# EAGLE board PCB-VU-SE-1 (EAGLE 6.4)
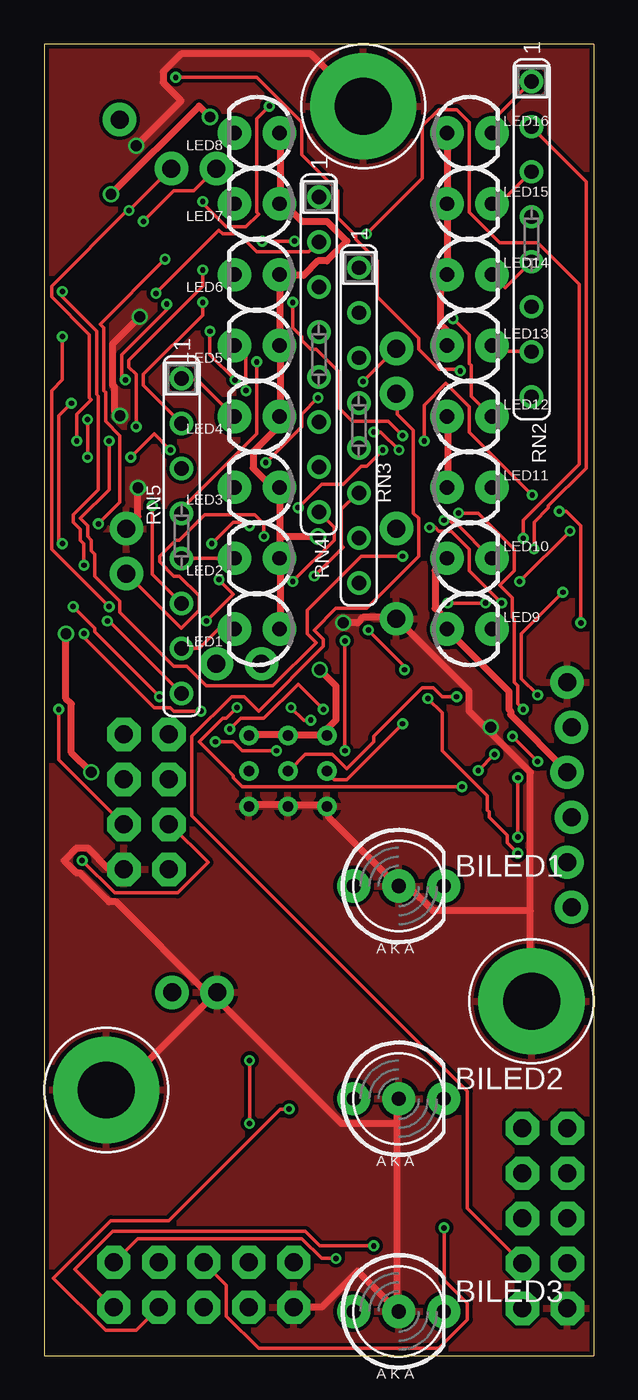
[diagram p0: board, top side]
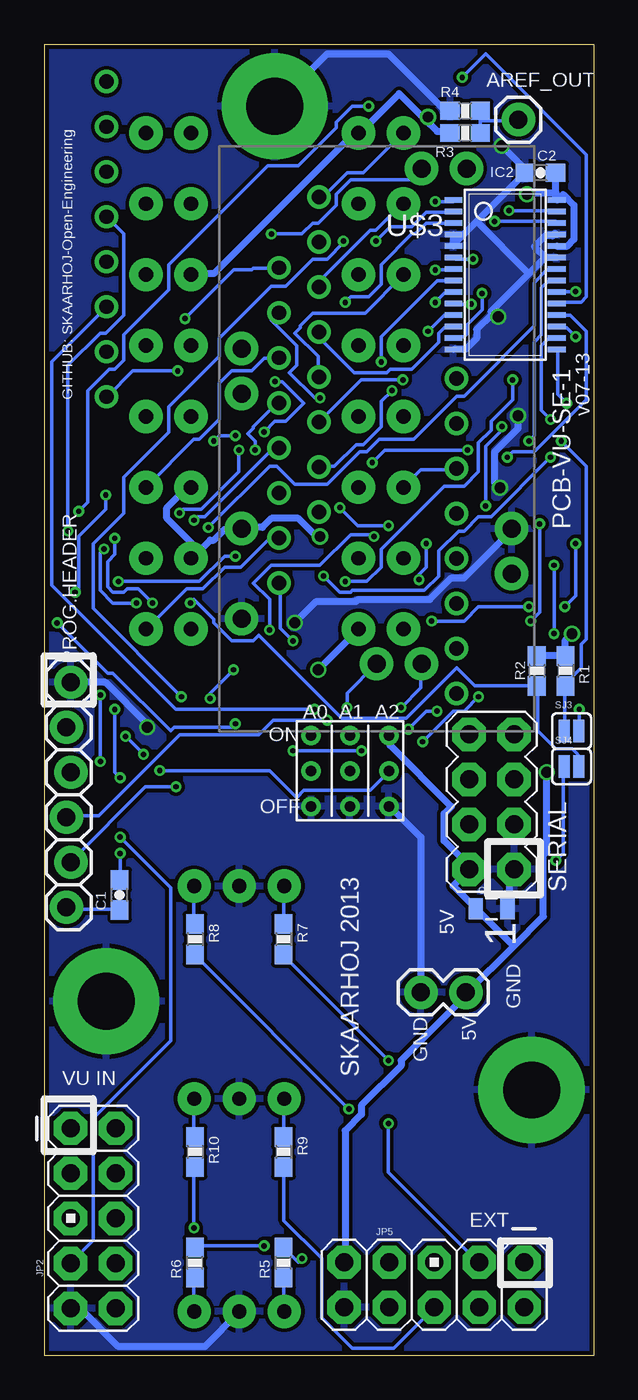
[diagram p1: board, bottom side, seen from below]

Size 31 x 74 mm. Coordinates in mm from the lower left corner, seen from the top.
Outline: 0,0 31,0 31,74 0,74 0,0
Copper layers (1*16): Top 0.035mm / dielectric 1.5mm / Bottom 0.035mm
Design rules "Fusion_eagle_rule_v1.1": minimum track width 6mil, minimum drill 12mil, track to track 6mil, track to pad 6mil, pad to pad 6mil, via to via 6mil, smd to smd 0mil, copper to edge 10mil, drill to drill 10mil, minimum pad ring 10mil, minimum via ring 6mil, stop-mask expansion 2mil, vias tented up to drill 100mil, thermal gap 10mil
Net classes: 0 default: width 0.203 mm, drill 0.305 mm, clearance 0.203 mm; 1 Power: width 0.406 mm, drill 0.61 mm, clearance 0.203 mm

## Footprints (pad centres in the part's own frame; a part is rotated, then mirrored left to right if it is on the bottom)
1X01 = drill 1.016 pad 1.88: 1 0,0
LED5MM-BICOLOR = drill 0.813 pad 1.88: A2 2.54,0; A3 -2.54,0; K1 0,0
0603-CAP = smd 1.1 x 1: 1 -0.85,0; 2 0.85,0
0805 = smd 0.8 x 1.2: 1 -0.9,0; 2 0.9,0
TSSOP28 = smd 0.305 x 0.991: 1 -4.225,-2.918; 2 -3.575,-2.918; 3 -2.925,-2.918; 4 -2.275,-2.918; 5 -1.625,-2.918; 6 -0.975,-2.918; 7 -0.325,-2.918; 8 0.325,-2.918; 9 0.975,-2.918; 10 1.625,-2.918; 11 2.275,-2.918; 12 2.925,-2.918; 13 3.575,-2.918; 14 4.225,-2.918; 15 4.225,2.918; 16 3.575,2.918; 17 2.925,2.918; 18 2.275,2.918; 19 1.625,2.918; 20 0.975,2.918; 21 0.325,2.918; 22 -0.325,2.918; 23 -0.975,2.918; 24 -1.625,2.918; 25 -2.275,2.918; 26 -2.925,2.918; 27 -3.575,2.918; 28 -4.225,2.918
1X02 = drill 1.016 pad 1.88: 1 0,0; 2 2.54,0
AVR_ICSP = drill 1.016 pad 1.88 octagon: 1 -1.27,5.08; 2 1.27,5.08; 3 -1.27,2.54; 4 1.27,2.54; 5 -1.27,0; 6 1.27,0; 7 -1.27,-2.54; 8 1.27,-2.54; 9 -1.27,-5.08; 10 1.27,-5.08
LED3MM = drill 0.813 pad 1.88: A -1.27,0; K 1.27,0
1X06_LOCK = drill 1.016 pad 1.88: 1 0,0; 2 2.54,-0.254; 3 5.08,0; 4 7.62,-0.254; 5 10.16,0; 6 12.7,-0.254
0603-RES = smd 1.1 x 1: 1 -0.85,0; 2 0.85,0
SIL8 = drill 0.813: 1 -8.89,0; 2 -6.35,0; 3 -3.81,0; 4 -1.27,0; 5 1.27,0; 6 3.81,0; 7 6.35,0; 8 8.89,0
2X4 = drill 1.016 pad 1.88 octagon: 1 -3.81,-1.27; 2 -3.81,1.27; 3 -1.27,-1.27; 4 -1.27,1.27; 5 1.27,-1.27; 6 1.27,1.27; 7 3.81,-1.27; 8 3.81,1.27
SJ_2S = smd 0.635 x 1.27: 1 -0.412,0; 2 0.412,0
ARDUINO_MINI_SE1 = drill 1.016 pad 1.88: 1 -7.62,7.62; 4 -7.62,5.08; 5 0,12.7; 6 -2.54,12.7; 8 -2.54,-15.24; 9 -5.08,-15.24; 17 7.62,-5.08; 18 7.62,-2.54; 21 7.62,5.08; 23 7.62,10.16
3.2MMPAD6MM = drill 3.2 pad 6: P$1 0,0
3BITADDR = drill 0.6: A0 -2.2,0; A1 0,0; A2 2.2,0; H1 -2.2,2; H2 0,2; H3 2.2,2; L1 -2.2,-2; L2 0,-2; L3 2.2,-2

## Placement (x,y rotation side)
AREF_OUT  M01PTH  [1X01]  4.25,69.75 0 bottom
BILED1  LEDBICOLOR-AKA  [LED5MM-BICOLOR]  20,26.5 0 top
BILED2  LEDBICOLOR-AKA  [LED5MM-BICOLOR]  20,14.5 0 top
BILED3  LEDBICOLOR-AKA  [LED5MM-BICOLOR]  20,2.5 0 top
C1  100nF  [0603-CAP]  26.75,26 90 bottom
C2  100nF  [0603-CAP]  3,66.75 180 bottom
C3  10uF  [0805]  5.76,25.23 0 bottom
IC2  PCA9685  [TSSOP28]  5,61 270 bottom
JP1  [1X02]  9.75,20.5 0 bottom
JP2  M05X2PTH  [AVR_ICSP]  28.25,7.75 0 bottom
JP5  M05X2PTH  [AVR_ICSP]  9,4 270 bottom
LED1  [LED3MM]  12,41 180 top
LED2  [LED3MM]  12,45 180 top
LED3  [LED3MM]  12,49 180 top
LED4  [LED3MM]  12,53 180 top
LED5  [LED3MM]  12,57 180 top
LED6  [LED3MM]  12,61 180 top
LED7  [LED3MM]  12,65 180 top
LED8  [LED3MM]  12,69 180 top
LED9  [LED3MM]  24,41 0 top
LED10  [LED3MM]  24,45 0 top
LED11  [LED3MM]  24,49 0 top
LED12  [LED3MM]  24,53 0 top
LED13  [LED3MM]  24,57 0 top
LED14  [LED3MM]  24,61 0 top
LED15  [LED3MM]  24,65 0 top
LED16  [LED3MM]  24,69 0 top
PROG.HEADER  [1X06_LOCK]  29.5,38 270 bottom
R1  1K5  [0603-RES]  1.58,38.65 270 bottom
R2  1K5  [0603-RES]  3.21,38.65 270 bottom
R3  [0603-RES]  7.25,69 180 bottom
R4  [0603-RES]  7.25,70.25 0 bottom
R5  270  [0603-RES]  17.5,5.25 90 bottom
R6  270  [0603-RES]  22.5,5.25 90 bottom
R7  270  [0603-RES]  17.5,23.5 270 bottom
R8  270  [0603-RES]  22.5,23.5 270 bottom
R9  270  [0603-RES]  17.5,11.5 270 bottom
R10  270  [0603-RES]  22.5,11.5 270 bottom
RN2  [SIL8]  27.5,63 270 top
RN3  [SIL8]  17.75,52.5 270 top
RN4  [SIL8]  15.5,56.5 270 top
RN5  [SIL8]  7.75,46.25 270 top
SERIAL  M04X2  [2X4]  5.76,31.25 90 bottom
SJ3  SOLDERJUMPERNC  [SJ_2S]  1.25,35.25 0 bottom
SJ4  SOLDERJUMPERNC  [SJ_2S]  1.25,33.25 0 bottom
U$3  ARDUINO_MINI_SE1  [ARDUINO_MINI_SE1]  12.25,51.75 180 bottom
U$15  GNDPAD6MM  [3.2MMPAD6MM]  3.5,15 0 top
U$18  GNDPAD6MM  [3.2MMPAD6MM]  27.5,20 0 top
U$19  3BITADDR  [3BITADDR]  13.75,33 0 bottom
U$20  GNDPAD6MM  [3.2MMPAD6MM]  18,70.5 0 top

## Library data of the parts
AREF_OUT C1-C3 JP1 JP2 JP5 LED1-LED16 PROG.HEADER R1-R10 SERIAL SJ3 SJ4 = SparkFun
BILED1-BILED3 U$3 U$15 U$18-U$20 = SKAARHOJ
IC2 = wsmith
RN2-RN5 = SKAARHOJ; OC_FARNELL: unknown; OC_NEWARK: unknown

## Nets
5V [Power]: C2.1 C3.1 IC2.24 IC2.28 JP1.2 JP5.9 LED1.A LED2.A LED3.A LED4.A LED5.A LED6.A LED7.A LED8.A LED9.A LED10.A LED11.A LED12.A LED13.A LED14.A LED15.A LED16.A PROG.HEADER.3 R1.1 R2.1 R3.2 SERIAL.2 U$3.21 U$19.H1 U$19.H2 U$19.H3
A0: IC2.1 U$19.A0
A1: IC2.2 U$19.A1
A2: IC2.3 U$19.A2
AREF: AREF_OUT.1 R3.1 R4.2
DISP_DATA_OUT: SERIAL.6
GND [Power]: BILED1.K1 BILED2.K1 BILED3.K1 C2.2 C3.2 IC2.4 IC2.5 IC2.14 IC2.23 IC2.25 JP1.1 JP2.9 JP5.10 PROG.HEADER.1 R4.1 SERIAL.1 U$3.4 U$3.23 U$15.P$1 U$18.P$1 U$19.L1 U$19.L2 U$19.L3 U$20.P$1
I2C_SCL: IC2.26 R2.2 SJ4.2 U$3.8
I2C_SDA: IC2.27 R1.2 SJ3.1 U$3.9
L0: LED1.K RN5.7
L1: LED2.K RN5.5
L2: LED3.K RN5.3
L3: LED4.K RN5.1
L4: LED5.K RN4.7
L5: LED6.K RN4.5
L6: LED7.K RN4.3
L7: LED8.K RN4.1
L8: LED9.K RN3.7
L9: LED10.K RN3.5
L10: LED11.K RN3.3
L11: LED12.K RN3.1
L12: LED13.K RN2.7
L13: LED14.K RN2.5
L14: LED15.K RN2.3
L15: LED16.K RN2.1
LED1: JP5.1 R5.2
LED2: JP5.2 R6.2
LED3: JP5.3 R7.2
LED4: JP5.4 R8.2
LED5: JP5.5 R10.2
LED6: JP5.6 R9.2
N$3: SERIAL.3 SJ3.2
N$4: IC2.13 RN4.2
N$5: IC2.12 RN4.4
N$6: SERIAL.4 SJ4.1
N$7: IC2.11 RN4.6
N$9: IC2.10 RN4.8
N$10: IC2.9 RN5.2
N$11: IC2.8 RN5.4
N$12: IC2.7 RN5.6
N$16: JP2.8 U$3.18
N$17: JP2.7 U$3.17
N$18: BILED3.A2 R6.1
N$19: IC2.6 RN5.8
N$20: IC2.15 RN3.8
N$21: IC2.16 RN3.6
N$22: IC2.17 RN3.4
N$23: IC2.18 RN3.2
N$24: IC2.19 RN2.8
N$25: IC2.20 RN2.6
N$26: IC2.21 RN2.4
N$27: IC2.22 RN2.2
N$28: BILED3.A3 R5.1
N$29: BILED1.A2 R8.1
N$30: BILED1.A3 R7.1
N$31: BILED2.A2 R10.1
N$32: BILED2.A3 R9.1
N$36: JP5.7
N$37: C1.2 U$3.1
N$42: JP5.8
PH6: C1.1 PROG.HEADER.6
RX: PROG.HEADER.4 U$3.5
SDI_MOSI: SERIAL.8
SDI_SCLK: SERIAL.7
SLIDER_IN: SERIAL.5
TX: PROG.HEADER.5 U$3.6

## Tracks (layer width: path | path; a pad name or v marks a point on that pad's centre or on a via)
5V  (via drill 0.61)
  Top 0.406: U$19.H3 11.58,35.05 13.72,35.05 U$19.H2 13.92,35.05 15.85,35.05 U$19.H1 15.85,35.26 16.46,35.87 16.46,37.8 v15.54,38.71 | v1.22,40.74 1.22,37.08 1.52,36.78 1.52,34.04 v2.64,32.92 | LED11.A 22.76,49.07 22.76,52.93 LED12.A | LED10.A 22.66,44.91 22.05,44.3 22.05,42.16 22.66,41.55 22.66,41.05 LED9.A 22.86,40.84 26.21,37.49 26.21,36.47 26.31,36.37 26.31,36.17 29.46,33.02 PROG.HEADER.3 | LED1.A 13.31,41.05 13.31,44.91 LED2.A 13.31,45.11 13.31,46.23 | 13.31,46.23 13.31,48.97 LED3.A 13.11,49.07 12.8,49.07 11.79,50.09 11.79,51 13.41,52.63 13.21,52.83 LED4.A 13.31,53.03 13.31,57 LED5.A 13.31,57.2 13.31,60.96 LED6.A 13.51,60.96 14.63,60.96 15.44,61.77 15.95,61.77 17.07,62.89 15.95,64.01 14.53,64.01 13.51,65.02 LED7.A 13.31,65.02 13.31,68.99 LED8.A | LED13.A 22.66,57.1 22.66,57.91 22.35,58.22 22.35,60.66 22.66,60.96 LED14.A 22.76,61.16 22.76,64.92 LED15.A 22.76,65.13 22.76,68.99 LED16.A | v3.76,65.53 8.74,70.51 v9.35,69.9 | 13.31,46.23 v15.44,46.23
  Bottom 0.406: U$19.H3 11.48,34.95 11.48,34.44 8.03,30.99 8.43,30.58 8.43,29.06 7.01,27.64 SERIAL.2 7.01,27.43 7.92,26.52 6.71,25.3 C3.1 6.5,25.09 4.52,23.11 | R2.1 3.15,39.52 1.63,39.52 R1.1 1.63,39.73 1.63,40.34 v1.22,40.74 | v2.64,32.92 2.64,28.45 2.85,28.25 2.85,24.79 4.52,23.11 | 4.52,23.11 7.11,20.52 JP1.2 7.21,20.32 10.87,16.66 10.87,16.36 13.11,14.12 13.11,13.61 14.02,12.7 14.02,5.28 JP5.9 | LED11.A 22.76,48.97 22.96,48.97 24.08,47.85 24.08,47.24 22.35,45.52 LED10.A 22.66,45.01 21.64,46.02 21.44,46.02 20.83,46.63 19.91,46.63 U$3.21 19.71,46.74 18.69,46.74 18.19,47.24 16.66,47.24 15.54,46.13 v15.44,46.23 | IC2.24 2.03,62.59 1.52,62.59 1.12,62.99 1.12,64.92 1.73,65.53 2.03,65.23 IC2.28 2.13,65.33 2.13,65.63 | 2.13,65.63 2.13,66.65 C2.1 | 9.55,69.8 10.97,71.22 13.21,68.99 LED8.A 13.41,69.09 21.44,61.06 22.66,61.06 LED14.A | 9.55,69.8 8.84,69.09 8.13,69.09 R3.2 | 2.13,65.63 3.66,65.63 v3.76,65.53 | v9.35,69.9 9.45,69.9 9.55,69.8 | v15.54,38.71 13.31,40.95 LED1.A
A0  (via drill 0.3)
  Top 0.203: v8.94,65.13 8.94,65.02 10.26,63.7 11.38,63.7 12.09,64.41 11.99,64.52 11.99,69.8 v12.7,70.51 | v29.06,47.65 29.46,47.65 30.28,46.84 v30.28,41.35 | v20.22,35.66 17.07,32.51 16.36,32.51 15.95,32.92 U$19.A0
  Bottom 0.203: v8.94,65.13 7.92,65.13 IC2.1 | v12.7,70.51 13.61,70.51 14.53,69.6 14.53,69.29 16.66,67.16 18.39,67.16 23.98,61.57 23.98,60.15 26.52,57.61 26.52,56.19 27.03,55.68 27.33,55.68 28.55,54.46 28.55,48.16 v29.06,47.65 | v30.28,41.35 27.43,38.51 27.13,38.51 23.88,35.26 23.67,35.46 20.42,35.46 v20.22,35.66
A1  (via drill 0.3)
  Top 0.203: v14.12,62.89 v12.29,62.89 | v23.27,37.19 22.45,37.19 21.95,37.69 21.34,37.69 18.59,34.95 18.59,34.65 17.07,33.12 16.26,33.93 14.73,33.93 13.82,33.02 U$19.A1
  Bottom 0.203: v12.29,62.89 11.48,63.7 10.26,63.7 9.45,64.52 7.92,64.52 IC2.2 | v14.12,62.89 14.12,62.79 15.04,61.87 15.85,61.87 17.37,60.35 18.19,60.35 21.13,57.4 21.13,56.39 23.98,53.54 23.98,52.12 26.52,49.58 26.52,47.55 28.25,45.82 28.25,42.16 v23.27,37.19
A2  (via drill 0.3)
  Top 0.203: v14.02,59.44 14.02,58.01 14.53,57.51 14.53,57.3 15.04,56.79 15.34,56.79 16.56,55.58 16.56,53.54 17.37,52.73 19.41,52.73 v20.22,51.92 | v21.44,51.61 21.44,53.65 22.66,54.86 23.98,53.54 23.98,52.12 v27.53,48.56 | v29.26,43.08 26.92,40.74 26.92,38.2 v27.84,37.29 | v26.42,34.95 v27.84,33.53 | v24.49,33.02 v25.4,33.93
  Bottom 0.203: v14.02,59.44 13.72,59.74 12.7,59.74 11.99,60.45 11.99,61.57 10.26,63.3 10.06,63.3 9.45,63.91 7.92,63.91 IC2.3 | v20.22,51.92 21.13,51.92 v21.44,51.61 | v27.53,48.56 27.53,47.75 29.06,46.23 29.06,43.28 v29.26,43.08 | v27.84,33.53 v27.84,37.29 | v25.4,33.93 v26.42,34.95 | v24.49,33.02 18.29,33.02 16.76,31.5 16.36,31.9 12.6,31.9 11.58,32.92 U$19.A2
AREF
  Bottom 0.203: 6.4,69.7 6.4,70.21 R4.2 | 6.4,69.7 6.4,69.09 R3.1 | 6.4,69.7 4.27,69.7 AREF_OUT.1
GND  (via drill 0.61)
  Top 0.406: JP5.10 14.12,2.74 15.65,2.74 17.68,4.78 19.91,2.54 BILED3.K1 19.91,2.74 19.91,13.11 | 19.91,13.11 19.91,14.43 BILED2.K1 | JP1.1 9.65,20.42 3.86,14.63 3.56,14.94 U$15.P$1 | SERIAL.1 4.47,27.53 3.56,27.53 2.44,28.65 1.83,28.65 1.12,27.94 1.83,27.23 2.03,27.23 3.66,25.6 4.06,25.6 9.35,20.32 JP1.1 | 19.91,13.11 16.76,13.11 9.65,20.22 JP1.1 | v5.18,68.28 7.72,70.81 6.71,71.83 6.71,72.44 7.72,73.46 15.04,73.46 17.98,70.51 U$20.P$1 | U$19.L3 11.58,31.09 13.72,31.09 U$19.L2 13.92,31.09 15.85,31.09 U$19.L1 16.05,30.89 16.05,30.38 19.91,26.52 BILED1.K1 20.12,26.42 20.62,26.42 21.95,25.09 27.43,25.09 | 24.99,35.36 27.43,32.92 27.43,25.09 | 24.99,35.36 23.98,36.37 23.98,37.49 19.91,41.55 U$3.23 19.71,41.66 17.98,41.66 17.68,41.35 v16.87,41.35 | 27.43,25.09 27.43,20.02 U$18.P$1 | v25.2,35.46 25.09,35.46 24.99,35.36 | v5.38,58.62 3.86,57.1 3.86,54.76 3.96,54.66 3.96,53.34 v4.27,53.03 | v5.28,48.97 5.28,47.35 4.67,46.74 U$3.4
  Bottom 0.406: JP2.9 29.46,2.64 28.96,2.64 26.82,0.51 21.95,0.51 20.02,2.44 BILED3.K1 | C3.2 4.78,25.3 4.78,27.23 4.57,27.43 SERIAL.1 | 7.92,62.79 7.92,63.2 IC2.4 | 7.92,62.79 7.92,62.69 IC2.5 | 6.6,64.01 7.82,62.79 7.92,62.79 | 6.6,64.01 3.96,66.65 3.86,66.65 C2.2 3.86,66.95 v5.18,68.28 | 2.74,61.98 2.13,61.98 IC2.23 | 2.74,61.98 3.35,62.59 2.74,63.2 2.34,63.2 2.23,63.3 2.13,63.3 IC2.25 | 5.79,58.73 6.6,57.91 6.6,57.4 7.21,56.79 7.82,56.79 IC2.14 | 5.79,58.73 5.79,58.93 3.66,61.06 | 2.74,61.98 3.66,61.06 | 3.66,61.06 6.6,64.01 | R4.1 8.13,70.31 8.43,70.31 11.58,73.46 15.04,73.46 17.98,70.51 U$20.P$1 | v25.2,35.46 25.09,35.56 27.53,38 29.46,38 PROG.HEADER.1 | v16.87,41.35 15.65,42.57 13.41,42.57 13.31,42.67 9.25,42.67 8.03,43.89 7.32,43.89 4.67,46.53 4.67,46.63 U$3.4 | v5.38,58.62 5.69,58.62 5.79,58.73 | v4.27,53.03 4.27,52.32 5.59,51 5.59,49.28 v5.28,48.97 | JP1.1 9.75,20.52 9.75,29.26 11.48,30.99 U$19.L3
  pour Top: 0,0 31,0 31,74 0,74
  pour Bottom: 0,0 31,0 31,74 0,74
I2C_SCL  (via drill 0.3)
  Top 0.203: v5.59,64.01 7.32,65.73 8.43,65.73 9.65,66.95 U$3.8 | v24.89,42.47 v22.76,42.47 | v27.03,46.13 27.03,47.14 30.18,50.29 30.18,60.45 27.84,62.79 25.7,62.79 23.98,64.52 23.98,69.6 23.27,70.31 22.25,70.31 21.34,69.39 21.34,66.45 v18.19,63.3
  Bottom 0.203: SJ4.2 0.91,33.33 0.61,33.63 1.22,34.24 2.13,34.24 3.15,35.26 3.15,37.8 R2.2 6.71,37.8 7.72,38.81 10.57,35.97 14.22,35.97 18.9,40.64 19.2,40.34 20.42,40.34 21.44,41.35 21.44,41.55 22.55,42.67 v22.76,42.47 | v5.59,64.01 2.13,64.01 IC2.26 | v24.89,42.47 25.7,43.28 26.31,43.28 26.52,43.08 27.13,43.08 27.43,43.38 27.43,44.81 27.03,45.21 v27.03,46.13 | v18.19,63.3 16.46,63.3 15.85,63.91 15.54,63.91 14.53,64.92 14.53,65.53 13.72,66.34 10.36,66.34 9.75,66.95 U$3.8
I2C_SDA  (via drill 0.3)
  Top 0.203: U$3.9 7.11,66.95 v4.78,64.62 4.78,64.72 0.41,60.35 0.41,59.74 2.54,57.61 2.54,54.05 2.64,53.95 1.83,53.14 v1.83,51.61
  Bottom 0.203: SJ3.1 1.63,35.26 1.63,37.8 R1.2 1.52,37.8 1.52,38 0.71,38.81 0.71,40.13 0.41,40.44 0.41,50.19 v1.83,51.61 | v4.78,64.62 2.13,64.62 IC2.27
L0
  Top 0.203: RN5.7 7.82,39.93 8.74,39.93 10.26,41.45 10.67,41.05 LED1.K
L1
  Top 0.203: RN5.5 7.82,45.01 10.67,45.01 LED2.K
L2
  Bottom 0.203: RN5.3 7.82,49.99 9.75,49.99 10.67,49.07 LED3.K
L3
  Top 0.203: RN5.1 7.82,55.07 8.64,55.07 10.67,53.03 LED4.K
L4  (via drill 0.3)
  Top 0.203: v11.38,54.46 11.38,56.39 10.77,57 LED5.K
  Bottom 0.203: v11.38,54.46 11.99,53.85 11.99,52.43 13.01,51.41 13.41,51.41 14.63,50.19 15.44,50.19 RN4.7
L5
  Bottom 0.203: RN4.5 15.54,55.27 15.54,56.39 16.87,57.71 16.56,58.01 16.56,58.12 15.85,58.83 12.9,58.83 10.77,60.96 LED6.K
L6
  Bottom 0.203: RN4.3 15.44,60.35 15.44,60.66 12.6,63.5 12.29,63.5 10.77,65.02 LED7.K
L7
  Bottom 0.203: RN4.1 15.44,65.43 15.24,65.43 13.92,66.75 13.01,66.75 10.77,68.99 LED8.K
L8
  Bottom 0.203: RN3.7 17.78,46.13 18.29,46.13 19.91,44.5 20.83,44.5 22.05,43.28 22.96,43.28 25.2,41.05 LED9.K
L9  (via drill 0.3)
  Top 0.203: v22.55,47.14 22.86,47.14 23.06,46.94 23.27,46.94 25.2,45.01 LED10.K
  Bottom 0.203: v22.55,47.14 22.35,47.35 21.95,47.35 18.09,51.21 17.78,51.21 RN3.5
L10
  Bottom 0.203: RN3.3 17.78,56.29 18.59,56.29 19.3,55.58 20.42,55.58 21.13,54.86 21.13,52.83 22.25,51.71 22.55,51.71 25.2,49.07 LED11.K
L11  (via drill 0.3)
  Top 0.203: v23.06,58.52 23.98,57.61 23.98,55.98 24.08,55.88 24.08,54.15 25.2,53.03 LED12.K
  Bottom 0.203: v23.06,58.52 20.32,61.27 19.3,61.27 19.2,61.37 17.78,61.37 RN3.1
L12
  Top 0.203: RN2.7 27.43,56.69 25.6,56.69 25.3,57 LED13.K
L13
  Top 0.203: RN2.5 27.43,61.67 26.01,60.25 25.3,60.96 LED14.K
L14
  Top 0.203: RN2.3 27.43,66.75 25.5,64.82 25.3,65.02 LED15.K
L15
  Top 0.203: RN2.1 27.43,71.83 24.99,69.39 25.3,69.09 LED16.K
LED1  (via drill 0.3)
  Top 0.203: v16.46,5.49 15.65,5.49 14.53,6.6 5.28,6.6 3.96,5.28 JP5.1
  Bottom 0.203: v16.46,5.49 16.66,5.28 17.48,6.1 R5.2
LED2  (via drill 0.3)
  Top 0.203: v18.59,6.2 15.54,6.2 14.73,7.01 3.86,7.01 1.73,4.88 3.86,2.74 JP5.2
  Bottom 0.203: v18.59,6.2 22.45,6.2 R6.2
LED3  (via drill 0.3)
  Top 0.203: v11.58,13.11 v11.58,16.66
  Bottom 0.203: v11.58,16.66 17.48,22.55 R7.2 | v11.58,13.11 11.58,10.36 6.5,5.28 JP5.3
LED4  (via drill 0.3)
  Top 0.203: v13.82,13.92 13.31,13.92 7.01,7.62 3.76,7.62 0.51,4.37 3.45,1.42 5.18,1.42 6.4,2.64 JP5.4
  Bottom 0.203: v13.82,13.92 22.45,22.55 R8.2
LED5  (via drill 0.3)
  Top 0.203: v22.55,7.21 22.55,4.27 23.88,2.95 23.88,2.03 22.25,0.41 12.09,0.41 10.26,2.23 10.26,3.96 9.04,5.18 JP5.5
  Bottom 0.203: v22.55,7.21 22.55,10.57 R10.2
LED6
  Bottom 0.203: R9.2 17.48,10.57 17.48,7.62 15.34,5.49 15.34,2.13 13.61,0.41 11.28,0.41 9.04,2.64 JP5.6
N$3  (via drill 0.3)
  Top 0.203: v0.81,36.47 0.81,33.63 4.47,29.97 SERIAL.3
  Bottom 0.203: v0.81,36.47 0.81,35.26 SJ3.2
N$4  (via drill 0.3)
  Top 0.203: v6.3,59.94 9.86,63.5 10.06,63.3 10.97,63.3 11.99,62.28 14.94,62.28 15.44,62.79 RN4.2
  Bottom 0.203: v6.3,59.94 6.3,59.03 7.11,58.22 7.11,57.71 7.32,57.51 7.82,57.51 IC2.13
N$5
  Bottom 0.203: IC2.12 7.92,58.01 8.43,58.01 8.74,57.71 8.74,57.2 10.26,55.68 11.48,55.68 11.68,55.47 13.51,55.47 15.65,57.61 15.54,57.71 RN4.4
N$6  (via drill 0.3)
  Top 0.203: v2.13,27.94 3.96,26.11 7.52,26.11 9.25,27.84 7.11,29.97 SERIAL.4
  Bottom 0.203: v2.13,27.94 1.73,28.35 1.73,33.22 SJ4.1
N$7  (via drill 0.3)
  Top 0.203: v9.35,57.81 9.35,56.49 v10.77,55.07
  Bottom 0.203: v9.35,57.81 8.43,58.73 IC2.11 | v10.77,55.07 13.11,55.07 15.44,52.73 RN4.6
N$9  (via drill 0.3)
  Top 0.203: v6.91,59.33 6.91,59.03 4.37,56.49 4.37,55.27 v4.57,55.07 | v14.02,43.69 16.36,46.02 16.36,46.74 15.54,47.55 RN4.8
  Bottom 0.203: v6.91,59.33 7.82,59.33 IC2.10 | v4.57,55.07 4.57,53.95 5.79,52.73 5.79,52.22 6.5,51.51 6.5,49.89 7.32,49.07 8.43,49.07 11.99,45.52 11.99,44.5 12.8,43.69 v14.02,43.69
N$10  (via drill 0.3)
  Top 0.203: v8.94,59.44 8.94,58.73 5.59,55.37 5.59,54.76 7.72,52.63 RN5.2
  Bottom 0.203: v8.94,59.44 8.43,59.94 7.92,59.94 IC2.9
N$11  (via drill 0.3)
  Top 0.203: v11.99,56.08 11.99,52.02 7.62,47.65 7.72,47.55 RN5.4
  Bottom 0.203: v11.99,56.08 11.99,57.51 8.84,60.66 7.92,60.66 IC2.8
N$12  (via drill 0.3)
  Top 0.203: v8.94,61.27 8.94,60.35 4.78,56.19 4.78,55.78 5.18,55.37 v5.18,52.43 | v6.1,47.95 6.1,44.09 7.72,42.47 RN5.6
  Bottom 0.203: v8.94,61.27 7.92,61.27 IC2.7 | v5.18,52.43 5.18,52.22 6.1,51.31 v6.1,47.95
N$16
  Top 0.203: U$3.18 19.91,54.25 19.91,53.14 20.83,52.22 20.83,47.55 21.13,47.24 21.13,45.11 18.19,42.16 16.46,42.16 15.24,40.95 15.75,40.44 15.75,40.03 12.09,36.37 11.28,37.19 10.57,37.19 8.33,34.95 8.33,30.48 23.88,14.94 23.88,8.33 26.92,5.28 JP2.8
N$17  (via drill 0.3)
  Top 0.203: v17.98,54.97 19.81,56.79 U$3.17 | v18.59,52.12 19,52.12 v20.02,51.1 | v23.37,47.55 24.49,47.55 26.52,45.52 26.52,44.3 25.7,43.48 26.42,42.77 26.42,41.66 26.52,41.55 26.52,38 26.72,37.8 26.72,36.78 v27.03,36.47 | v26.72,29.26 v26.72,32.61
  Bottom 0.203: v17.98,54.97 17.58,54.97 16.36,53.75 17.37,52.73 17.98,52.73 v18.59,52.12 | v20.02,51.1 20.02,49.89 22.15,47.75 23.16,47.75 v23.37,47.55 | v27.03,36.47 27.03,32.92 v26.72,32.61 | v26.72,29.26 23.88,26.42 23.88,17.78 28.25,13.41 28.25,6.5 29.46,5.28 JP2.7
N$18
  Bottom 0.203: R6.1 22.55,4.37 22.55,2.54 BILED3.A2
N$19  (via drill 0.3)
  Top 0.203: v6.81,61.87 3.15,58.22 3.35,58.01 3.35,54.46 3.45,54.36 3.45,52.73 4.27,51.92 4.27,48.16 v3.05,46.94 | v3.56,41.45 3.66,41.45 7.72,37.39 RN5.8
  Bottom 0.203: v6.81,61.87 7.82,61.87 IC2.6 | v3.05,46.94 3.05,41.96 v3.56,41.45
N$20  (via drill 0.3)
  Top 0.203: v1.52,53.75 0.81,53.03 0.81,46.02 v1.02,45.82 | v1.63,42.27 2.85,41.05 2.85,40.84 v6.5,37.19 | v9.65,34.65 10.67,34.65 11.18,34.14 v13.11,34.14 | v16.97,40.34 v16.97,34.14
  Bottom 0.203: v1.52,53.75 2.03,54.25 2.03,56.69 IC2.15 | v1.02,45.82 1.02,42.88 v1.63,42.27 | v6.5,37.19 7.32,36.37 7.92,36.37 v9.65,34.65 | v16.97,34.14 v13.11,34.14 | v16.97,40.34 17.68,41.05 17.68,43.59 RN3.8
N$21  (via drill 0.3)
  Top 0.203: v2.44,50.7 v2.44,52.83 | v15.24,43.99 16.87,45.62 16.76,45.72 16.76,47.75 17.68,48.67 RN3.6
  Bottom 0.203: v2.44,52.83 2.95,53.34 2.95,57 2.54,57.4 2.13,57.4 IC2.16 | v2.44,50.7 5.79,47.35 6.5,47.35 7.32,46.53 7.62,46.53 8.74,45.41 8.74,43.99 9.55,43.18 13.61,43.18 13.72,43.08 14.33,43.08 v15.24,43.99
N$22  (via drill 0.3)
  Top 0.203: v1.02,57.51 1.02,55.07 0.41,54.46 0.41,45.52 v3.66,42.27 | v9.14,41.45 10.67,42.98 v9.86,43.79 | v9.45,45.82 10.67,47.04 11.38,47.04 v11.58,46.84 | v14.33,47.85 15.65,49.17 16.87,49.17 17.88,50.19 18.19,50.19 v19.1,51.1
  Bottom 0.203: v1.02,57.51 1.52,58.01 2.03,58.01 IC2.17 | v3.66,42.27 6.5,42.27 7.32,41.45 v9.14,41.45 | v9.86,43.79 9.86,44.09 9.45,44.5 v9.45,45.82 | v11.58,46.84 13.31,46.84 v14.33,47.85 | v19.1,51.1 19.1,51.61 19.51,52.02 19.2,52.32 19.2,52.43 17.78,53.85 RN3.4
N$23  (via drill 0.3)
  Top 0.203: v4.88,50.7 6.2,52.02 v7.11,51.1 | v12.5,50.39 14.53,52.43 14.53,53.14 v15.44,54.05
  Bottom 0.203: v4.88,50.7 4.57,51 3.35,51 0.41,53.95 0.41,57.81 1.32,58.73 2.03,58.73 IC2.18 | v7.11,51.1 11.79,51.1 v12.5,50.39 | v15.44,54.05 15.75,54.05 17.17,55.47 16.76,55.88 16.76,57 18.19,58.42 17.78,58.83 RN3.2
N$24  (via drill 0.3)
  Top 0.203: v7.42,72.14 11.99,72.14 14.53,69.6 14.53,67.77 16.56,65.73 16.56,64.21 17.58,63.2 17.58,62.99 18.8,61.77 18.8,59.74 21.13,57.4 21.13,56.79 22.25,55.68 23.37,55.68 v23.47,55.58
  Bottom 0.203: v7.42,72.14 6.1,73.46 0.41,67.77 0.41,59.74 0.71,59.44 2.03,59.44 IC2.19 | v23.47,55.58 26.01,55.58 27.43,54.15 RN2.8
N$25  (via drill 0.3)
  Top 0.203: v1.02,60.05 1.02,59.74 2.95,57.81 2.95,54.25 3.05,54.15 3.05,48.87 1.63,47.45 1.63,47.04 2.03,46.63 2.03,46.02 2.23,45.82 v2.23,44.6 | v2.23,40.74 2.23,40.54 6.2,36.58 7.11,36.58 7.32,36.37 v8.84,36.37 | v10.46,35.36 11.07,35.97 12.39,35.97 14.33,37.9 v15.75,36.47
  Bottom 0.203: v1.02,60.05 2.03,60.05 IC2.20 | v2.23,40.74 v2.23,44.6 | v8.84,36.37 9.45,36.37 v10.46,35.36 | v15.75,36.47 23.57,36.47 30.58,43.48 30.58,56.08 27.53,59.13 RN2.6
N$26  (via drill 0.3)
  Top 0.203: v3.66,51.61 3.66,48.87 2.03,47.24 2.44,46.84 2.44,46.23 2.64,46.02 2.64,45.41 2.85,45.21 2.85,43.99 4.27,42.57 4.27,41.96 7.32,38.91 8.03,38.91 9.14,37.8 12.9,37.8 15.34,40.23 14.83,40.74 14.83,42.06 17.88,45.11 v20.22,45.11 | v29.67,46.53 v26.82,43.69
  Bottom 0.203: v3.66,51.61 3.35,51.92 3.35,57.2 2.95,57.61 2.95,60.25 2.54,60.66 2.13,60.66 IC2.21 | v20.22,45.11 20.83,45.11 22.25,43.69 v26.82,43.69 | v29.67,46.53 29.67,55.88 27.84,57.71 27.53,57.71 26.52,58.73 26.52,63.3 27.43,64.21 RN2.4
N$27  (via drill 0.3)
  Top 0.203: v21.74,46.74 22.05,46.74 22.25,46.53 22.96,46.53 23.98,45.52 23.98,44.3 v25.81,42.47 | v27.64,45.52 27.64,47.04 28.45,47.85 28.45,47.95 30.58,50.09 30.58,66.24 27.53,69.29 RN2.2
  Bottom 0.203: v21.74,46.74 18.29,50.19 17.88,50.19 16.87,49.17 15.04,49.17 13.21,51 12.8,51 12.09,51.71 10.16,51.71 7.72,54.15 7.32,54.15 3.35,58.12 3.35,60.55 2.64,61.27 2.13,61.27 IC2.22 | v25.81,42.47 27.13,42.47 27.84,43.18 27.84,45.31 v27.64,45.52
N$28
  Bottom 0.203: R5.1 17.48,4.37 17.48,2.54 BILED3.A3
N$29
  Bottom 0.203: R8.1 22.55,24.38 22.55,26.42 BILED1.A2
N$30
  Bottom 0.203: R7.1 17.48,24.38 17.48,26.42 BILED1.A3
N$31
  Bottom 0.203: R10.1 22.55,12.39 22.55,14.43 BILED2.A2
N$32
  Bottom 0.203: R9.1 17.48,12.39 17.48,14.43 BILED2.A3
N$37  (via drill 0.3)
  Top 0.203: v26.72,28.35 26.11,28.96 26.11,29.36 25.09,30.38 25.09,30.68 24.99,30.79 24.99,31.6 22.45,34.14 22.45,36.27 v21.64,37.08 | v20.32,38.71 20.32,38.91 v18.29,40.95 | v12.39,46.23 12.39,46.94 11.89,47.45 9.04,47.45 7.62,46.02 7.42,46.02 6.5,45.11 6.5,44.81 7.32,43.99 7.62,43.99 8.74,42.88 8.74,42.06 7.72,41.05 4.67,44.09 U$3.1
  Bottom 0.203: v26.72,28.35 26.72,26.92 C1.2 | v21.64,37.08 21.64,37.39 v20.32,38.71 | v18.29,40.95 18.29,42.67 19.2,43.59 18.19,44.6 15.44,44.6 13.72,46.33 12.5,46.33 v12.39,46.23
PH6
  Bottom 0.203: C1.1 26.82,25.2 29.57,25.2 29.67,25.3 PROG.HEADER.6
RX  (via drill 0.3)
  Top 0.203: v15.04,35.87 14.63,35.87 v13.92,36.58
  Bottom 0.203: v15.04,35.87 18.09,35.87 18.9,35.05 23.37,35.05 27.94,30.48 29.67,30.48 PROG.HEADER.4 | v13.92,36.58 13.92,37.39 12.29,39.01 U$3.5
TX  (via drill 0.3)
  Top 0.203: v10.87,36.58 10.26,35.97 10.06,35.97 8.74,34.65 10.67,32.72 10.67,32.61 11.18,32.11 v23.57,32.11
  Bottom 0.203: v10.87,36.58 9.75,37.69 9.75,39.01 U$3.6 | v23.57,32.11 25.3,32.11 29.46,27.94 PROG.HEADER.5

## Text on the board
_bsilk: PCB-VU-SE-1 | GITHUB: SKAARHOJ-Open-Engineering | v07-13 | SKAARHOJ 2013 | 5V | 1 | GND | 5V | GND | VU IN | EXT